# EAGLE board FTIR_v0.1 (EAGLE 7.1.0)
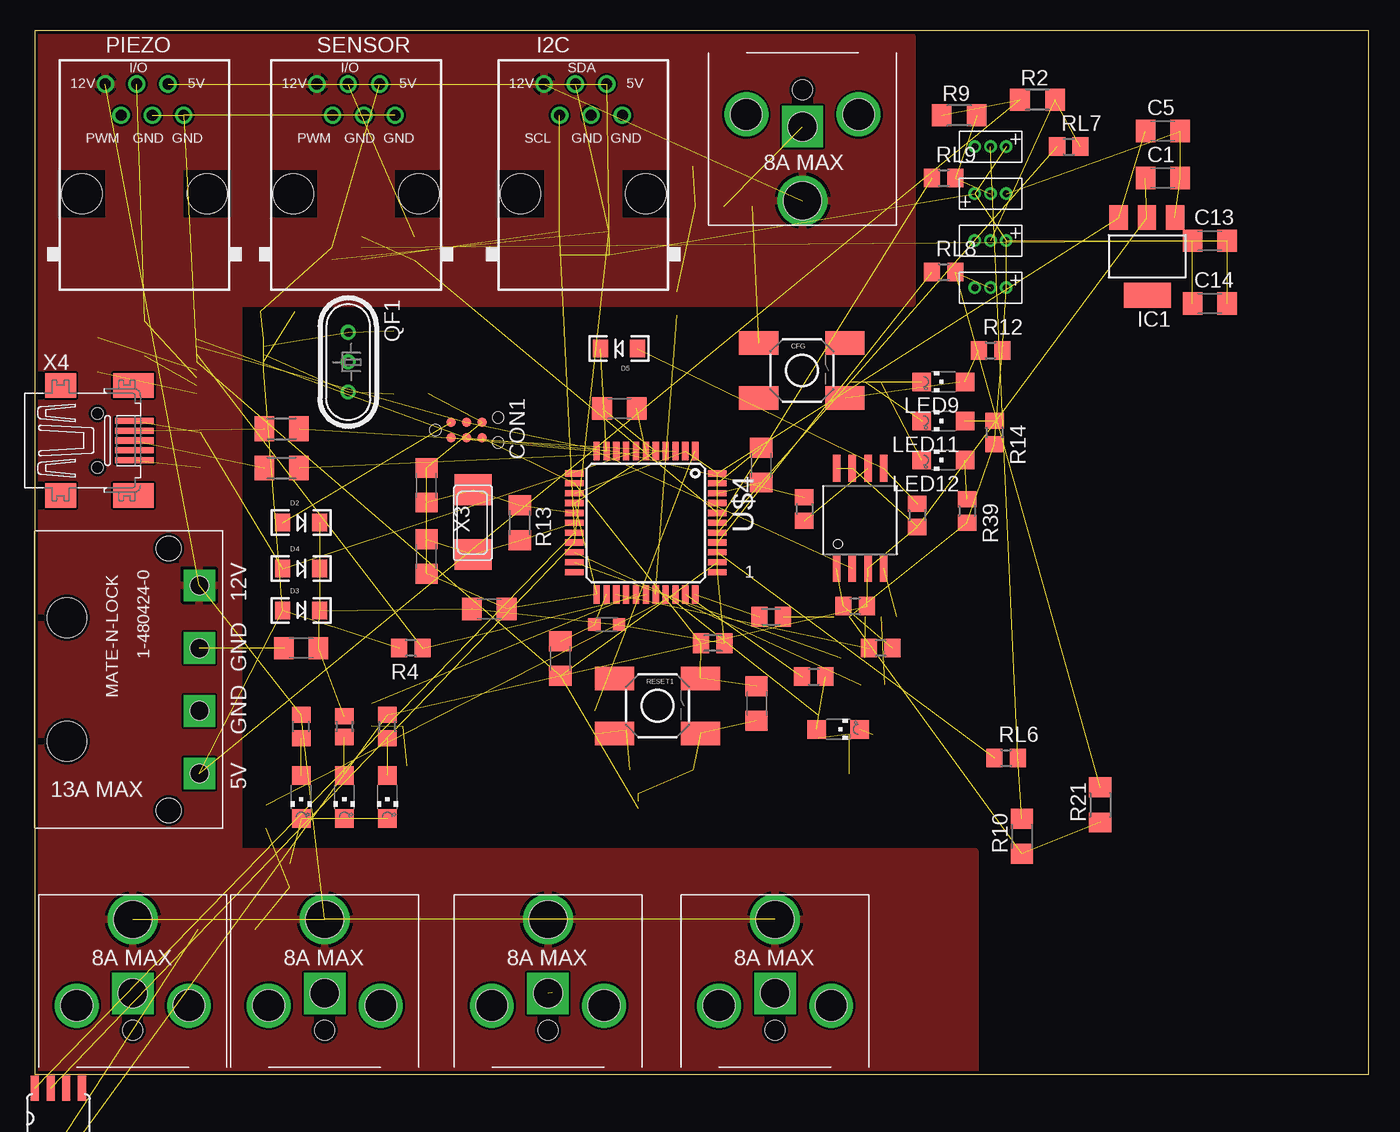
[diagram p0: board, top side]
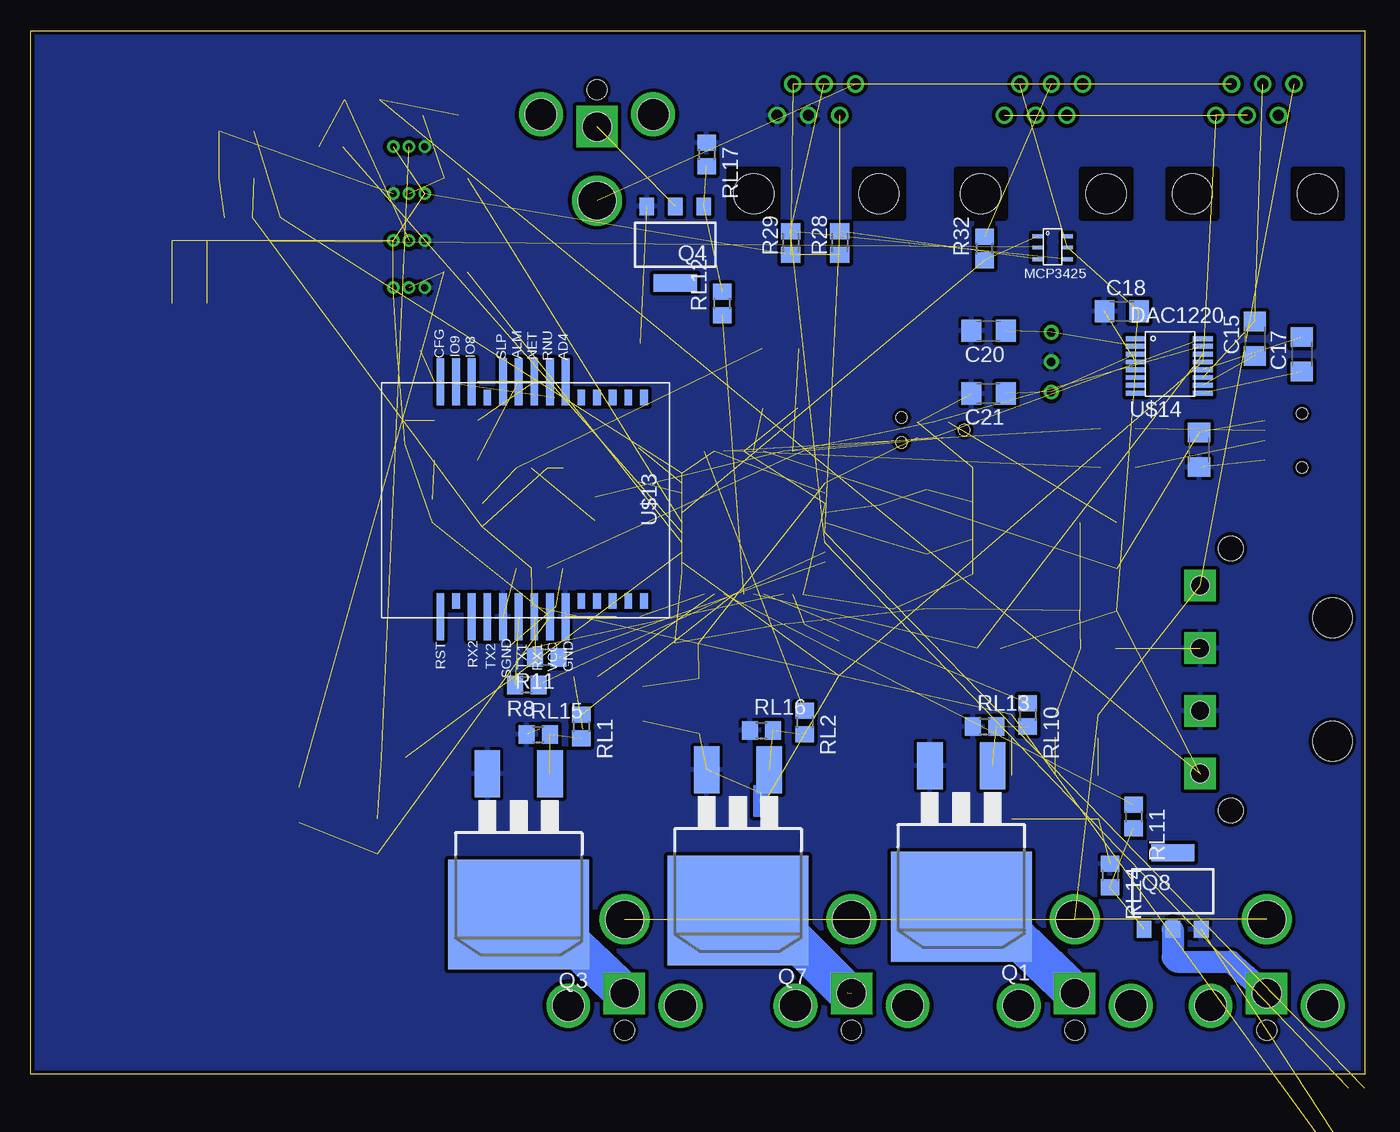
[diagram p1: board, bottom side, seen from below]

Size 108.13 x 84.57 mm. Coordinates in mm from the lower left corner, seen from the top.
Outline: 0,0 108.13,0 108.13,84.57 0,84.57 0,0
Copper layers (1*2*15*16): Top 0.035mm / dielectric 0.2mm / layer 2 0.0175mm / dielectric 1.1mm / layer 15 0.0175mm / dielectric 0.2mm / Bottom 0.035mm
Design rules "SeeedStudio_DRU_no_angle_20130527 *": minimum track width 6mil, minimum drill 0.5mm, track to track 7.5mil, track to pad 7.5mil, pad to pad 7.5mil, via to via 7.5mil, smd to smd 0mil, copper to edge 10mil, drill to drill 10mil, minimum pad ring 6mil, minimum via ring 6mil, stop-mask expansion 2mil, vias tented up to drill 25mil, thermal gap 10mil
Net classes: 0 default: width 0.305 mm; 1 power: width 0.457 mm; 2 VIN: width 0.457 mm; 3 fine: width 0.254 mm; 4 aref: width 0.305 mm
vRestrict: area 41.9,37.1 to 57.2,40.9; area 41.9,38.4 to 45.7,52.3; area 53.3,39.6 to 57.2,52.3; area 41.9,48.5 to 57.2,52.3

## Footprints (pad centres in the part's own frame; a part is rotated, then mirrored left to right if it is on the bottom)
CHIPLED_1206 = smd 1.5 x 1.5: A 0,-1.75; C 0,1.75
C1206 = smd 1.6 x 1.8: 1 -1.4,0; 2 1.4,0
TACTILE_SWITCH_SMD = smd 3.175 x 1.905: 1 -3.493,2.223; 2 3.493,2.223; 3 -3.493,-2.223; 4 3.493,-2.223
TC2030-MCP-NL = smd 0.787 x 0.787: 5V 1.27,0.635; GND 3.81,0.635; MISO 1.27,-0.635; MOSI 2.54,0.635; RESET 3.81,-0.635; SCK 2.54,-0.635 | hole 0.889: 0,0; 5.08,-1.016; 5.08,1.016
LED-1206 = smd 1.2 x 1.4: A -1.5,0; C 1.5,0
RJ12-STRAIGHT-I2C = drill 0.9 pad 1.4: +5V 1.905,8.89; +12V -3.175,8.89; GND1 3.175,6.35; GND2 0.635,6.35; SCL -1.905,6.35; SDA -0.635,8.89 | hole 3.251: -5.08,0; 5.08,0
SOT223 = smd 1.499 x 2.007: 1 -2.261,-3.15; 2 0.025,-3.15; 3 2.311,-3.15 | smd 3.81 x 2.007: 4 0,3.15
L2012C = smd 1 x 1: 1 -1,0; 2 1,0
RJ12-STRAIGHT = drill 0.9 pad 1.4: +5V 1.905,8.89; +12V -3.175,8.89; GND1 3.175,6.35; GND2 0.635,6.35; I/O -0.635,8.89; PWM -1.905,6.35 | hole 3.251: -5.08,0; 5.08,0
D2PACK = smd 2.083 x 3.81: 1 -2.54,-8.89; 3 2.54,-8.89 | smd 11.43 x 8.89: 2 0,2.54
PG-SOT-223 = smd 1.2 x 1.4: 1 -2.311,-3.099; 2 0,-3.099; 3 2.311,-3.099 | smd 3.5 x 1.4: 4 0,3.099
HC49U = drill 0.7 pad 1.2: 1 -2.413,0; 2 -0.027,0; 3 2.413,0
R0805 = smd 1.3 x 1.5: 1 -0.95,0; 2 0.95,0
R1206 = smd 1.6 x 1.803: 1 -1.422,0; 2 1.422,0
M0805 = smd 1.3 x 1.6: 1 -0.95,0; 2 0.95,0
M1206 = smd 1.6 x 2: 1 -1.4,0; 2 1.4,0
R0805' = smd 1.3 x 1.5: 1 -0.85,0; 2 0.85,0
SOIC_8-LEAD = smd 0.61 x 2.21: CE -1.905,-2.934; RST/HOLD -0.635,5.156; SCK 0.635,5.156; SI 1.905,5.156; SO -0.635,-2.934; VDD -1.905,5.156; VSS 1.905,-2.934; WP 0.635,-2.934
STAR = smd 0.152 x 0.305: AGND 0.635,-0.635; DGND 0.635,0.635 | smd 0.305 x 0.152: GND 0.635,0
AMP_MATE_N_LOCK = drill 1.499 pad 2.54 square: 5V 1.905,-7.62; 12V 1.905,7.62; GND1 1.905,2.54; GND2 1.905,-2.54 | hole 1.499: 1.905,-7.62; 1.905,-2.54; 1.905,2.54; 1.905,7.62 | hole 1.999: -0.594,10.617; -0.594,-10.617 | hole 3.2: -8.824,-5; -8.824,5
TQFP44 = smd 1.5 x 0.5: 1 -5.8,4; 2 -5.8,3.2; 3 -5.8,2.4; 4 -5.8,1.6; 5 -5.8,0.8; 6 -5.8,0; 7 -5.8,-0.8; 8 -5.8,-1.6; 9 -5.8,-2.4; 10 -5.8,-3.2; 11 -5.8,-4; 23 5.8,-4; 24 5.8,-3.2; 25 5.8,-2.4; 26 5.8,-1.6; 27 5.8,-0.8; 28 5.8,0; 29 5.8,0.8; 30 5.8,1.6; 31 5.8,2.4; 32 5.8,3.2; 33 5.8,4 | smd 0.5 x 1.5: 12 -4,-5.8; 13 -3.2,-5.8; 14 -2.4,-5.8; 15 -1.6,-5.8; 16 -0.8,-5.8; 17 0,-5.8; 18 0.8,-5.8; 19 1.6,-5.8; 20 2.4,-5.8; 21 3.2,-5.8; 22 4,-5.8; 34 4,5.8; 35 3.2,5.8; 36 2.4,5.8; 37 1.6,5.8; 38 0.8,5.8; 39 0,5.8; 40 -0.8,5.8; 41 -1.6,5.8; 42 -2.4,5.8; 43 -3.2,5.8; 44 -4,5.8
CHIPCAP = smd 0.66 x 2.032: 1 -2.54,-3.073; 2 -1.27,-3.073; 3 0,-3.073; 4 1.27,-3.073; 5 1.27,2.438; 6 0,2.438; 7 -1.27,2.438; 8 -2.54,2.438
PJ-063BH = drill 2.337 square: GND 0,-5.994 | drill 2.54: SHD1 -4.547,-5.004; SHD2 4.547,-5.004 | drill 3.048: V+ 0,-11.989 | hole 1.6: 0,-2.997 | hole 2.54: -4.547,-5.004; 4.547,-5.004 | hole 3.048: 0,-11.989 | hole 2.337: 0,-5.994
3PINS_SMALL = drill 0.559 pad 1.016: 1 -1.27,0; 2 0,0; 3 1.27,0
SZ05-ZIGBEE3 = smd 1.27 x 0.635: AD1 -7.62,6.35; AD2 -7.62,5.08; AD3 -7.62,3.81; C485 -7.62,-3.81; IO1 -7.62,8.89; IO2 -7.62,7.62; IO3 8.89,8.89; IO4 8.89,7.62; IO5 8.89,6.35; IO6 8.89,5.08; IO7 8.89,3.81; MS 8.89,-6.35 | smd 3.81 x 0.635: AD4 -8.89,2.54; ALM -8.89,-1.27; CFG -8.89,-7.62; GND 10.16,2.54; IO8 -8.89,-5.08; IO9 -8.89,-6.35; NET -8.89,0; RST 10.16,-7.62; RUN -8.89,1.27; RX1 10.16,0; RX2 10.16,-5.08; SLD -8.89,-2.54; SND 10.16,-2.54; TX1 10.16,-1.27; TX2 10.16,-3.81; VCC 10.16,1.27
SSOP-16 = smd 0.4 x 1.6: AGND 1.89,2.134; AVDD 2.52,-3.3; C1 4.409,2.134; C2 3.78,2.134; CS 1.26,2.134; DGND 1.89,-3.3; DNC 3.15,-3.3; DNC1 3.78,-3.3; DNC2 4.409,-3.3; DVDD 0,-3.3; SCLK 0,2.134; SDIO 0.63,2.134; VOUT 3.15,2.134; VREF 2.52,2.134; XIN 1.26,-3.3; XOUT 0.63,-3.3
SOT-23-6 = smd 0.305 x 0.9: SCL 2.45,-0.45; SDA 2.45,1.95; VDD 1.5,1.95; VIN+ 0.6,-0.45; VIN- 0.6,1.95; VSS 1.5,-0.45
NX6035 = smd 2.5 x 3: P$1 2.665,0; P$2 -2.565,0
32005-201 = smd 3.1 x 0.5: 1 3,1.6; 2 3,0.8; 3 3,0; 4 3,-0.8; 5 3,-1.6 | smd 2.5 x 2: M1 -3,-4.45; M2 -3,4.45 | smd 3.3 x 2: M3 2.9,4.45; M4 2.9,-4.45 | hole 0.9: 0,2.2; 0,-2.2

## Placement (x,y rotation side)
3.3V-OK  RED  [CHIPLED_1206]  28.57,22.48 180 top
5V-OK  RED  [CHIPLED_1206]  25.08,22.48 180 top
12V-OK  RED  [CHIPLED_1206]  21.59,22.48 180 top
BLINK  GREEN  [CHIPLED_1206]  65.13,27.97 270 top
C1  10uF  [C1206]  91.44,72.64 0 top
C2  22pF  [C1206]  31.75,47.75 270 top
C3  100nF  [C1206]  47.38,53.97 0 top
C4  100nF  [C1206]  2.54,-11.18 0 top  (outside the outline)
C5  10uF  [C1206]  91.44,76.45 0 top
C6  220nF  [C1206]  2.54,-17.53 0 top  (outside the outline)
C7  10uF  [C1206]  13.41,50.62 90 bottom
C8  22pF  [C1206]  31.75,41.97 90 top
C9  100nF  [C1206]  58.51,30.06 270 top
C10  10uF  [C1206]  21.59,34.54 180 top
C11  100nF  [C1206]  58.88,49.38 90 top
C12  100nF  [C1206]  36.83,37.72 180 top
C13  100nF  [C1206]  95.25,67.56 0 top
C14  10uF  [C1206]  95.25,62.48 0 top
C15  2.2nF  [C1206]  8.89,59.63 90 bottom
C16  100nF  [C1206]  42.6,33.71 90 top
C17  0.22nF  [C1206]  5.08,58.36 90 bottom
C18  4.7uF  [C1206]  19.68,61.85 0 bottom
C20  18pF  [C1206]  30.48,60.26 180 bottom
C21  18pF  [C1206]  30.48,55.18 180 bottom
CFG  Configure  [TACTILE_SWITCH_SMD]  62.18,57.05 0 top
CON1  SPI  [TC2030-MCP-NL]  32.46,52.22 0 top
D2  1N581D1206  [LED-1206]  21.59,44.72 0 top
D3  1N581D1206  [LED-1206]  21.59,37.59 0 top
D4  1N581D1206  [LED-1206]  21.59,41 0 top
D5  1N581D1206  [LED-1206]  47.36,58.83 180 top
I2C  RJ12STRAIGHT-I2C  [RJ12-STRAIGHT-I2C]  44.45,71.37 0 top
IC1  REG1117  [SOT223]  90.17,66.29 180 top
L1  10uH  [L2012C]  46.35,36.45 0 top
LED9  RED  [CHIPLED_1206]  73.66,56.13 90 top
LED11  RED  [CHIPLED_1206]  73.66,52.96 90 top
LED12  RED  [CHIPLED_1206]  73.66,49.78 90 top
PIEZO  RJ12  [RJ12-STRAIGHT]  8.89,71.37 0 top
Q1  IRF3704S  [D2PACK]  32.7,16.13 180 bottom
Q3  IRF3704S  [D2PACK]  68.58,15.49 180 bottom
Q4  BSP75  [PG-SOT-223]  55.88,67.25 180 bottom
Q7  IRF3704S  [D2PACK]  50.8,15.81 180 bottom
Q8  BSP75  [PG-SOT-223]  15.56,14.86 0 bottom
QF1  ECS-10.7-7.5A  [HC49U]  25.4,57.72 270 top
R1  10k  [R0805]  71.53,45.31 270 top
R2  4.7k  [R1206]  81.28,78.99 0 top
R3  10k  [M0805]  59.69,37.08 180 top
R4  10k  [R0805]  30.48,34.54 180 top
R8  1K  [R0805]  67.93,31.56 180 bottom
R9  4.7k  [R1206]  74.93,77.72 0 top
R10  4.7k  [R1206]  80.01,19.3 90 top
R11  1K  [R0805]  66.29,33.78 180 bottom
R12  1K  [R0805]  77.47,58.67 0 top
R13  1M  [R1206]  39.32,44.7 270 top
R14  1K  [R0805]  77.79,52.01 270 top
R15  10k  [M0805]  54.97,34.95 0 top
R16  10k  [R0805]  66.5,37.95 0 top
R17  1k  [R0805]  68.58,34.54 180 top
R18  10k  [R0805]  62.38,45.82 270 top
R21  4.7k  [R1206]  86.36,21.84 90 top
R24  22  [M1206]  20,49.15 180 top
R27  1K  [R0805]  28.57,28.19 90 top
R28  10K  [M0805]  42.55,67.39 90 bottom
R29  10K  [M0805]  46.53,67.39 90 bottom
R31  22  [M1206]  20,52.32 180 top
R32  1k  [R0805]  30.8,66.93 90 bottom
R39  1K  [R0805]  75.56,45.66 270 top
RESET1  Reset uC  [TACTILE_SWITCH_SMD]  50.47,29.87 0 top
RL1  1K  [R0805]  63.5,28.19 270 bottom
RL2  1K  [R0805]  45.4,28.51 270 bottom
RL3  1K  [R0805]  21.59,28.19 90 top
RL4  1K  [R0805']  25.08,28.19 270 top
RL5  1K  [R0805]  63.14,32.23 0 top
RL6  1K  [R0805]  78.74,25.65 0 top
RL7  1K  [R0805]  83.82,75.18 0 top
RL8  1K  [R0805]  73.66,65.02 0 top
RL9  1K  [R0805]  73.66,72.64 0 top
RL10  1K  [R0805]  27.3,29.15 270 bottom
RL11  1K  [R0805]  18.73,20.89 270 bottom
RL12  1K  [R0805]  52.07,62.48 90 bottom
RL13  10K  [R0805]  30.8,28.19 0 bottom
RL14  10K  [R0805]  20.64,16.13 270 bottom
RL15  10K  [R0805]  66.99,27.56 0 bottom
RL16  10K  [R0805]  48.9,27.88 0 bottom
RL17  10K  [R0805]  53.34,74.55 270 bottom
SENSOR  RJ12  [RJ12-STRAIGHT]  26.04,71.37 0 top
U$1  SST25VF064C  [SOIC_8-LEAD]  66.9,43.97 0 top
U$2  STARGND  [STAR]  49.56,22.15 0 bottom
U$3  AMP_MATE_N_LOCK  [AMP_MATE_N_LOCK]  11.43,32 0 top
U$4  ATMEGA32U4  [TQFP44]  49.53,44.7 270 top
U$5  CHIPCAP  [CHIPCAP]  2.54,-3.56 0 top
U$6  JACK_PJ-063BH  [PJ-063BH]  41.59,0.57 180 top
U$9  DS18B20_PINS  [3PINS_SMALL]  77.47,75.18 180 top
U$10  DS18B20_PINS  [3PINS_SMALL]  77.47,63.75 180 top
U$11  DS18B20_PINS  [3PINS_SMALL]  77.47,67.56 180 top
U$12  DS18B20_PINS  [3PINS_SMALL]  77.47,71.37 0 top
U$13  SZ05-ZIGBEESMD  [SZ05-ZIGBEE3]  67.31,47.24 270 bottom
U$14  DAC1220  [SSOP-16]  15.24,59.63 270 bottom
U$15  MCP3425  [SOT-23-6]  26.04,68.52 270 bottom
U$16  JACK_PJ-063BH  [PJ-063BH]  60.01,0.57 180 top
U$17  JACK_PJ-063BH  [PJ-063BH]  23.5,0.57 180 top
U$18  JACK_PJ-063BH  [PJ-063BH]  7.94,0.57 180 top
U$19  JACK_PJ-063BH  [PJ-063BH]  62.23,82.8 0 top
X3  16MHz  [NX6035]  35.51,44.7 90 top
X4  MINI-USB  [32005-201]  5.08,51.37 0 top

## Library data of the parts
3.3V-OK 5V-OK 12V-OK BLINK LED9 LED11 LED12 U$4 = adafruit
C1-C18 C20 C21 L1 R1 R4 R8 R11-R14 R16-R18 R27 R32 R39 RL1-RL3 RL5-RL17 = rcl
CFG CON1 D2-D5 I2C PIEZO RESET1 SENSOR U$2 U$3 U$5 U$6 U$9-U$13 U$16-U$19 X3 = lpatiny
IC1 = burr-brown; MPN: REG1117; OC_FARNELL: 1097566; OC_NEWARK: 14P6981
Q1 Q3 Q7 = transistor-power
Q4 Q8 = infineon; OC_FARNELL: unknown; OC_NEWARK: unknown
QF1 = crystal; OC_FARNELL: unknown; OC_NEWARK: unknown
R2 R3 R9 R10 R15 R21 R24 R28 R29 R31 RL4 = resistor
U$1 = BertaLib
U$14 = FTIR
U$15 = phMeter
X4 = con-cypressindustries; OC_FARNELL: unknown; OC_NEWARK: unknown

## Nets
2.5V: C17.2 U$14.VREF
3.3V [power]: C1.1 C6.1 IC1.2 R1.2 R16.2 R27.2 U$1.RST/HOLD U$1.VDD U$1.WP U$5.3
+5V [power]: C13.2 C14.2 C18.2 D3.A I2C.+5V PIEZO.+5V R2.1 R4.2 R9.1 R10.1 R12.2 R14.2 R21.1 R28.1 R29.1 R39.2 SENSOR.+5V U$3.5V U$9.1 U$10.1 U$11.1 U$12.1 U$13.VCC U$14.AVDD U$14.DVDD U$15.VDD
+5V/1 [fine]: C5.1 C10.1 C12.2 D2.C D3.C D4.C IC1.3 L1.2 R15.2 RL4.1 U$4.2 U$4.14 U$4.34 U$4.44
+12V [power]: I2C.+12V PIEZO.+12V RL3.2 SENSOR.+12V U$3.12V U$6.V+ U$16.V+ U$17.V+ U$18.V+ U$19.V+
A0: RL6.1 U$4.36
A1: RL8.1 U$4.37
A2: RL7.1 U$4.38
A3: RL9.1 U$4.39
A4: R32.1 U$4.40 U$15.VIN+
A5: U$4.41
AGND: C11.2 C16.1 PIEZO.GND1 PIEZO.GND2 SENSOR.GND1 SENSOR.GND2 U$2.AGND U$4.35 U$4.43 U$14.AGND
AREF: C11.1 U$4.42
CS: R17.2 U$4.25
D5*: RL11.1 U$4.31
D6*: RL10.1 U$4.27
D7*: RL2.1 U$4.1
D8*: R4.1 U$4.28 U$14.CS
D9*: RL12.1 U$4.29
D10*: RL1.1 U$4.30
D11*: U$4.12
D12*: U$4.26
D13*: RL5.1 U$4.32
DGND: C13.1 C14.1 U$15.VSS
FMOSI: D5.A R1.1 U$1.SI
GND [power]: 3.3V-OK.C 5V-OK.C 12V-OK.C BLINK.C C1.2 C2.1 C3.1 C4.2 C5.2 C6.2 C7.1 C8.1 C9.2 C10.2 C12.1 C18.1 C20.2 C21.2 CFG.1 CON1.GND I2C.GND1 I2C.GND2 IC1.1 Q1.3 Q3.3 Q4.3 Q7.3 Q8.3 QF1.2 R3.1 RESET1.4 RL13.1 RL14.1 RL15.1 RL16.1 RL17.1 U$1.VSS U$2.DGND U$2.GND U$3.GND1 U$3.GND2 U$4.5 U$4.15 U$4.23 U$5.2 U$9.3 U$10.3 U$11.3 U$12.3 U$13.GND U$13.SND U$14.DGND X4.5
GND1 [VIN]: LED9.C U$13.RUN
GND2 [VIN]: LED11.C U$13.NET
GND3 [VIN]: LED12.C U$13.ALM
HWB: R3.2 U$4.33
ISP+5V: CON1.5V D2.A
MISO: CON1.MISO U$1.SO U$4.11
MOSI: CON1.MOSI D5.C U$4.10 U$14.SDIO
N$1: Q4.1 RL12.2 RL17.2
N$2: R32.2 SENSOR.I/O
N$3: BLINK.A RL5.2
N$4: Q4.2 U$19.GND
N$6: Q7.1 RL2.2 RL16.2
N$7: Q1.2 U$17.GND
N$8: C4.1 U$5.1
N$9 [power]: R21.2 RL8.2 U$10.2
N$10: R16.1 R17.1 U$1.CE
N$11: R11.2 U$13.RX1
N$12: 5V-OK.A RL4.2
N$13: Q3.1 RL1.2 RL15.2
N$14 [fine]: C16.2 L1.1 U$4.24
N$15: C15.1 U$14.C2
N$16: C3.2 U$4.6
N$17 [power]: R2.2 RL7.2 U$11.2
N$18 [power]: R9.2 RL9.2 U$12.2
N$19: C21.1 QF1.3 U$14.XIN
N$20: 3.3V-OK.A R27.1
N$21 [power]: R10.2 RL6.2 U$9.2
N$22: Q8.2 U$18.GND
N$23: R18.2 U$1.SCK
N$24: R8.2 U$13.TX1
N$25: LED9.A R12.1
N$26: LED11.A R14.1
N$27: LED12.A R39.1
N$28: Q1.1 RL10.2 RL13.2
N$29: C17.1 U$14.C1
N$30: Q7.2 U$6.GND
N$31: C20.1 QF1.1 U$14.XOUT
N$34: Q3.2 U$16.GND
N$35: CFG.4 U$13.CFG
N$37: Q8.1 RL11.2 RL14.2
N$42: C8.2 R13.2 U$4.17 X3.P$2
N$75: 12V-OK.A RL3.1
PIEZO: C15.2 PIEZO.I/O U$14.VOUT
RESET: C9.1 CON1.RESET R15.1 RESET1.2 U$4.13
RX: R8.1 U$4.20
RXLED: U$4.8
SCK: CON1.SCK R18.1 U$4.9 U$14.SCLK
SCL: I2C.SCL R28.2 U$4.18 U$5.8 U$15.SCL
SDA: I2C.SDA R29.2 U$4.19 U$5.7 U$15.SDA
TX: R11.1 U$4.21
TXLED: U$4.22
USB_N: R31.1 U$4.3
USB_P: R24.1 U$4.4
USBC_N: R31.2 X4.2
USBC_P: R24.2 X4.3
VUSB: C7.2 D4.A U$4.7 X4.1
XTAL1: C2.2 R13.1 U$4.16 X3.P$1

## Tracks (layer width: path | path; a pad name or v marks a point on that pad's centre or on a via)
2.5V  (1 unrouted)
3.3V  (9 unrouted)
+5V  (25 unrouted)
+5V/1  (13 unrouted)
+12V  (7 unrouted)
  pour Top: 0,0.25 76.2,0.25 76.2,18.03 16.51,18.03 16.51,62.48 71.12,62.48 71.12,84.07 0,84.07
A0  (1 unrouted)
A1  (1 unrouted)
A2  (1 unrouted)
A3  (1 unrouted)
A4  (2 unrouted)
AGND  (9 unrouted)
AREF  (1 unrouted)
CS  (1 unrouted)
D5*  (1 unrouted)
D6*  (1 unrouted)
D7*  (1 unrouted)
D8*  (2 unrouted)
D9*  (1 unrouted)
D10*  (1 unrouted)
D13*  (1 unrouted)
DGND  (2 unrouted)
FMOSI  (2 unrouted)
GND  (28 unrouted)
  pour Bottom (isolate 0.305, rank 2): 0,84.07 107.95,84.07 107.95,0.25 0,0.25
GND1  (1 unrouted)
GND2  (1 unrouted)
GND3  (1 unrouted)
HWB  (1 unrouted)
ISP+5V  (1 unrouted)
MISO  (2 unrouted)
MOSI  (3 unrouted)
N$1  (2 unrouted)
N$2  (1 unrouted)
N$3  (1 unrouted)
N$4  (1 unrouted)
N$6  (2 unrouted)
N$7
  Bottom 1.676: Q1.2 30.84,13.59
  Bottom 3.302: 30.84,13.59 U$17.GND
N$8  (1 unrouted)
N$9  (2 unrouted)
N$10  (2 unrouted)
N$11  (1 unrouted)
N$12  (1 unrouted)
N$13  (2 unrouted)
N$14  (2 unrouted)
N$15  (1 unrouted)
N$16  (1 unrouted)
N$17  (2 unrouted)
N$18  (2 unrouted)
N$19  (2 unrouted)
N$20  (1 unrouted)
N$21  (2 unrouted)
N$22
  Bottom 1.778: Q8.2 15.56,9.46 15.24,9.14 10.83,9.14 U$18.GND
N$23  (1 unrouted)
N$24  (1 unrouted)
N$25  (1 unrouted)
N$26  (1 unrouted)
N$27  (1 unrouted)
N$28  (2 unrouted)
N$29  (1 unrouted)
N$30  (1 unrouted)
  Bottom 1.676: Q7.2 48.62,13.27
  Bottom 3.048: 48.62,13.27 48.58,13.27
  Bottom 3.302: 48.58,13.27 41.91,6.6
N$31  (2 unrouted)
N$34
  Bottom 3.048: Q3.2 66.71,12.95
  Bottom 3.302: 66.71,12.95 U$16.GND
N$35  (1 unrouted)
N$37  (2 unrouted)
N$42  (3 unrouted)
N$75  (1 unrouted)
PIEZO  (2 unrouted)
RESET  (4 unrouted)
RX  (1 unrouted)
SCK  (3 unrouted)
SCL  (4 unrouted)
SDA  (4 unrouted)
TX  (1 unrouted)
USB_N  (1 unrouted)
USB_P  (1 unrouted)
USBC_N  (1 unrouted)
USBC_P  (1 unrouted)
VUSB  (3 unrouted)
XTAL1  (3 unrouted)

## Text on the board
tNames: 1
203bmp: C:/Users/G/Pictures/logo_epfl.bmp